# EAGLE board Battery Control (EAGLE 9.0.0)
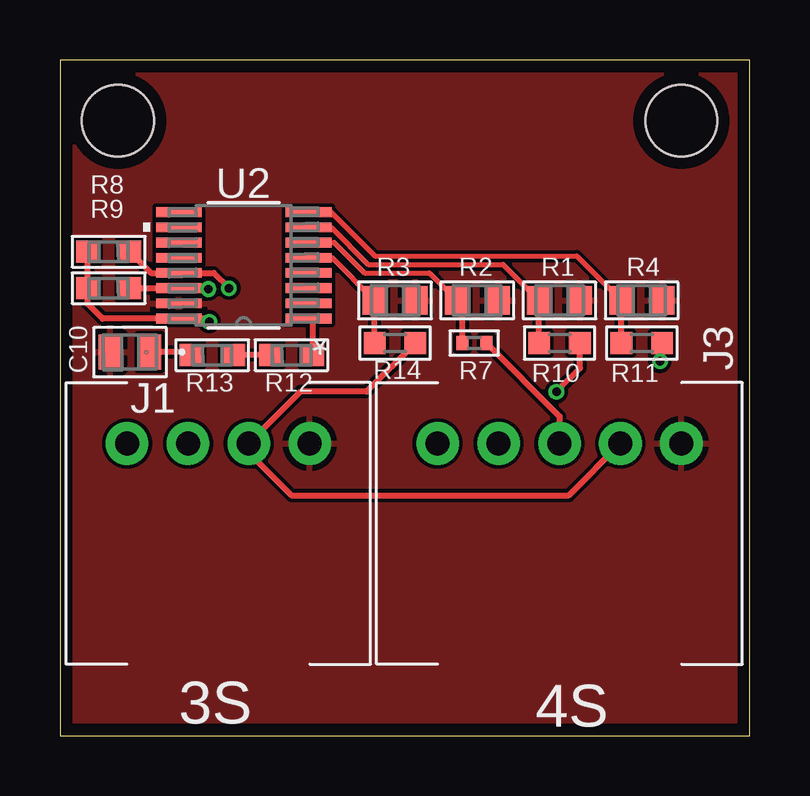
[diagram p0: board, top side]
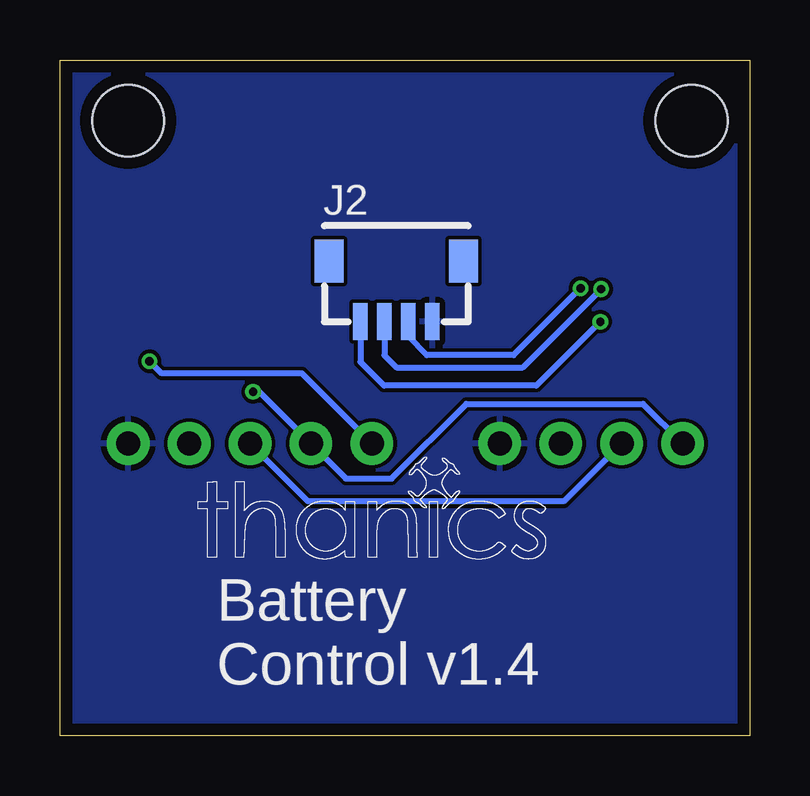
[diagram p1: board, bottom side, seen from below]

Size 28.75 x 28.18 mm. Coordinates in mm from the lower left corner, seen from the top.
Outline: 0,0 28.75,0 28.75,28.18 0,28.18 0,0
Copper layers (1*16): Top 0.035mm / dielectric 1.6mm / Bottom 0.035mm
Design rules "Elecrow_2-layer_PCB_eagle_rule": minimum track width 6mil, minimum drill 12mil, track to track 6mil, track to pad 6mil, pad to pad 6mil, via to via 8mil, smd to smd 0mil, copper to edge 20mil, drill to drill 10mil, minimum pad ring 6mil, minimum via ring 6mil, stop-mask expansion 0mil, vias tented up to drill 100mil, thermal gap 10mil
Holes 3 mm at 25.91,25.65 2.41,25.65

## Footprints (pad centres in the part's own frame; a part is rotated, then mirrored left to right if it is on the bottom)
0805 = smd 0.965 x 1.448: 1 -0.826,0; 2 0.826,0
JST-XH_4POS = drill 1 pad 1.778: 1 0,3.81; 2 0,1.27; 3 0,-1.27; 4 0,-3.81
JST_SH_4POS = smd 0.6 x 1.55: 1 -1.5,0; 2 -0.5,0; 3 0.5,0; 4 1.5,0 | smd 1.2 x 1.8: P$5 -2.8,2.525; P$6 2.8,2.525
JST-XH_5POS = drill 1 pad 1.778: 1 0,5.08; 2 0,2.54; 3 0,0; 4 0,-2.54; 5 0,-5.08
RC0805N = smd 1.006 x 1.2: 1 -0.853,0; 2 0.853,0
R0402 = smd 0.5 x 0.6: 1 -0.5,0; 2 0.5,0
RC0603N-M = smd 0.965 x 0.914: 1 -0.876,0; 2 0.876,0
R0603 = smd 0.9 x 0.9: 1 -0.85,0; 2 0.85,0
21-0055H_16-M = smd 1.905 x 0.406: 1 -2.705,2.223; 2 -2.705,1.587; 3 -2.705,0.953; 4 -2.705,0.318; 5 -2.705,-0.318; 6 -2.705,-0.953; 7 -2.705,-1.587; 8 -2.705,-2.223; 9 2.705,-2.223; 10 2.705,-1.587; 11 2.705,-0.953; 12 2.705,-0.318; 13 2.705,0.318; 14 2.705,0.953; 15 2.705,1.587; 16 2.705,2.223

## Placement (x,y rotation side)
C10  0.1uF  [0805]  2.92,16 180 top
J1  JST-XH_4POS  [JST-XH_4POS]  6.6,12.19 90 top
J2  [JST_SH_4POS]  14.73,17.27 0 bottom
J3  JST-XH_5POS  [JST-XH_5POS]  20.83,12.19 90 top
R1  10k 0.1%  [RC0805N]  20.83,18.16 180 top
R2  10k 0.1%  [RC0805N]  17.4,18.16 180 top
R3  10k 0.1%  [RC0805N]  13.97,18.16 180 top
R4  10k 0.1%  [RC0805N]  24.26,18.16 180 top
R7  15.6k  [R0402]  17.27,16.38 0 top
R8  1k  [RC0603N-M]  2.03,20.19 0 top
R9  1k  [RC0603N-M]  2.03,18.67 0 top
R10  28.4k  [R0603]  20.83,16.38 0 top
R11  41.2k  [R0603]  24.26,16.38 0 top
R12  1k  [RC0603N-M]  9.65,15.88 180 top
R13  1k  [RC0603N-M]  6.35,15.88 180 top
R14  2.74k  [R0603]  13.97,16.38 0 top
U2  MAX11608EEE+21-0055H_16-M  [21-0055H_16-M]  7.66,19.62 180 top

## Library data of the parts
C10 = Controller Board; COPYRIGHT: Copyright C 2015 Accelerated Designs. All rights reserved; MANUFACTURER_PART_NUMBER: 08055C104KAT2A; VENDOR: Vendor
J1 J3 = thanics-connector
J2 = thanics_robotics
R1-R4 = 10k-resistor; CASE: 0805 2012 metric; COMPOSITION: Thin Film; COPYRIGHT: Copyright C 2015 Accelerated Designs. All rights reserved; DATASHEET: httpindustrial.panasonic.comwwwcgijvcr13pz.cgi?E+PZ+3+AOA0026+ERA6AEB103V+7+WW; DIGIKEYPARTNUMBER: P10KDATRND; HEIGHT: 0.024" 0.60mm; LEADSTYLE: Surface Mount SMD SMT; MANUFACTURER_PART_NUMBER: ERA6AEB103V; NUMBEROFTERMINATIONS: 2; PACKAGECASE: 0805 2012 Metric; PACKAGING: Tape &amp Reel TR; POWERWATTS: 0.125W 18W; QUANTITY_AVAILABLE: 225000; RESISTANCEINOHMS: 10.0K; RESISTANCEOHMS: 10K; SIZEDIMENSION: 0.079" L x 0.049" W 2.00mm x 1.25mm; TEMPERATURECOEFFICIENT: 25ppm°C; TOLERANCE: 0.1%; VENDOR: Panasonic; VOLTAGEWORKING: 100V
R7 R10 R11 R14 = thanics-resistor; TOLERANCE: 0.1%
R8 R9 R12 R13 = Controller Board; CASE: 0603 1608 metric; COMPOSITION: Thick Film; COPYRIGHT: Copyright C 2015 Accelerated Designs. All rights reserved; DATASHEET: httpwww.yageo.comdocumentsrecentPYuRC0603_51_RoHS_L_4.pdf; DESCRIPTION: RES 1.0K OHM 110W 5% 0603 SMD; DIGIKEYPARTNUMBER: 3111.0KGRTRND; HEIGHT: 0.022" 0.55mm; LEADSTYLE: Surface Mount SMD SMT; MANUFACTURER_PART_NUMBER: RC0603JR071KL; NEWARKPARTNUMBER: 14M7231; NUMBEROFTERMINATIONS: 2; PACKAGECASE: 0603 1608 Metric; PACKAGING: Tape &amp Reel TR; POWERWATTS: 0.1W 110W; QUANTITY_AVAILABLE: 0; RESISTANCEINOHMS: 1.00K; RESISTANCEOHMS: 1K; SIZEDIMENSION: 0.063" L x 0.031" W 1.60mm x 0.80mm; TEMPERATURECOEFFICIENT: 100ppm°C; TOLERANCE: 5%; VENDOR: Yageo; VOLTAGEWORKING: 50V
U2 = 8ch ADC; COPYRIGHT: Copyright C 2015 Accelerated Designs. All rights reserved; DATAINTERFACE: I²C Serial; DATASHEET: httpdatasheets.maximic.comendsMAX11606MAX11611.pdf; DESCRIPTION: IC ADC SERIAL 10BIT 8CH 16QSOP; DIGIKEYPARTNUMBER: MAX11608EEE+ND; MANUFACTURER_PART_NUMBER: MAX11608EEE+; MOUNTINGTYPE: Surface Mount; NUMBEROFBITS: 10; NUMBEROFCONVERTERS: 1; NUMBEROFINPUTSANDTYPE: 8 SingleEnded Unipolar 8 SingleEnded Bipolar 4 Differential Unipolar 4 Differential Bipolar; OPERATINGTEMPERATURE: 40°C ~ 85°C; PACKAGECASE: 16SSOP 0.154" 3.90mm Width; PACKAGING: Tube; POWERDISSIPATIONMAX: 666.7mW; QUANTITY_AVAILABLE: 814; SAMPLINGRATEPERSECOND: 94.4k; SUPPLIERDEVICEPACKAGE: 16QSOP; VENDOR: Maxim Integrated Products; VOLTAGESUPPLYSOURCE: Single Supply

## Nets
+3V3: J2.1 R8.1 R9.1 U2.16
C1: R3.2 R14.1 U2.5
C2: R2.2 R7.1 U2.6
C3: R1.2 R10.1 U2.7
C4: R4.2 R11.1 U2.8
GND: C10.2 J1.4 J2.4 J3.5 R1.1 R2.1 R3.1 R4.1 U2.15
I2C_SCL: J2.3 R8.2 U2.13
I2C_SDA: J2.2 R9.2 U2.14
N$1: R12.1 U2.1
N$8: J1.3 J3.4 R14.2
N$10: J1.2 J3.3 R7.2
N$13: J1.1 J3.2 R10.2
N$16: J3.1 R11.2
N$24: R12.2 R13.1
N$28: C10.1 R13.2

## Tracks (layer width: path | path; a pad name or v marks a point on that pad's centre or on a via)
+3V3  (via drill 0.35)
  Top 0.254: R8.1 R9.1 1.16,18.02 1.78,17.4 U2.16 6.1,17.4 v6.22,17.27
  Bottom 0.254: J2.1 16.23,15.6 15.24,14.6 8.89,14.6 v6.22,17.27
C1
  Top 0.203: R3.2 11.34,19.94 U2.5
  Top 0.254: R14.1 R3.2
C2
  Top 0.203: R2.2 15.4,19.3 12.7,19.3 11.43,20.57 U2.6
  Top 0.254: R7.1 16.77,17.94 R2.2
C3
  Top 0.203: R1.2 18.48,19.66 12.85,19.66 11.3,21.21 U2.7
  Top 0.254: R10.1 R1.2
C4
  Top 0.203: U2.8 11.3,21.84 13.13,20.02 21.55,20.02 R4.2
  Top 0.254: R11.1 R4.2
GND
  pour Bottom: 0,28.19 28.83,28.19 28.83,0 0,0
  pour Top: 0,28.19 28.7,28.19 28.7,0 0,0
I2C_SCL  (via drill 0.35)
  Top 0.254: R8.2 3.8,19.3 U2.13 6.41,19.3 v7.05,18.67
  Bottom 0.254: v7.05,18.67 9.84,15.88 13.46,15.88 14.23,16.65 J2.3
I2C_SDA  (via drill 0.35)
  Top 0.254: R9.2 U2.14 4.99,18.63 v6.19,18.63
  Bottom 0.254: J2.2 15.23,15.87 14.73,15.37 9.45,15.37 v6.19,18.63
N$1
  Top 0.254: U2.1 10.53,17.23 R12.1
N$8
  Top 0.254: R14.2 12.79,14.35 10.03,14.35 J1.3 7.87,11.81 9.65,10.03 21.21,10.03 J3.4
N$10
  Top 0.254: R7.2 20.83,13.33 J3.3
  Bottom 0.254: J1.2 7.75,9.78 18.41,9.78 J3.3
N$13  (via drill 0.35)
  Top 0.254: v20.7,14.35 21.68,15.33 R10.2
  Bottom 0.254: v20.7,14.35 20.45,14.35 J3.2 16.83,10.73 14.92,10.73 11.81,13.84 4.45,13.84 J1.1
N$16  (via drill 0.35)
  Top 0.254: v25.02,15.62 25.11,15.71 R11.2
  Bottom 0.254: J3.1 18.67,15.11 24.51,15.11 v25.02,15.62
N$24
  Top 0.254: R12.2 R13.1
N$28
  Top 0.254: R13.2 5.35,16 C10.1

## Text on the board
bPlace: Battery / Control v1.4
tNames: 3S | 4S